# Altium PCB PMOD_Shifter_PCB_to1v8.PcbDoc
Units mil, origin at the board's own origin, x right, y up, seen from the top; angles counter-clockwise.
Board outline 1650 x 780 mil, 2 copper layers (Top Layer, Bottom Layer); 16 components, 20 nets, 82 pads, 8 vias.
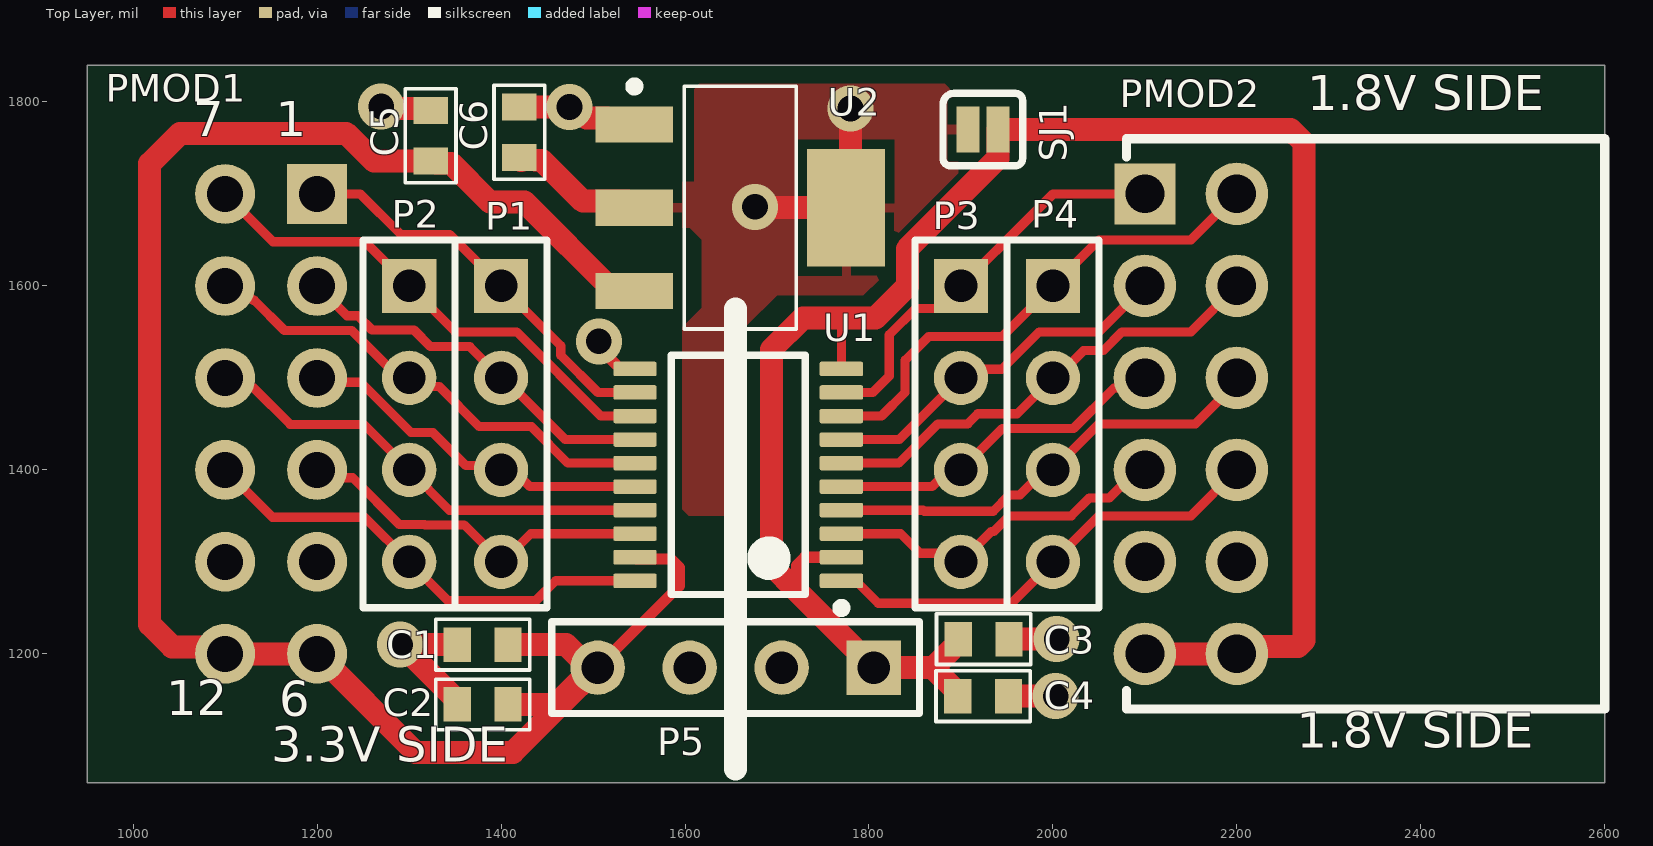
[diagram p0: Top Layer view]
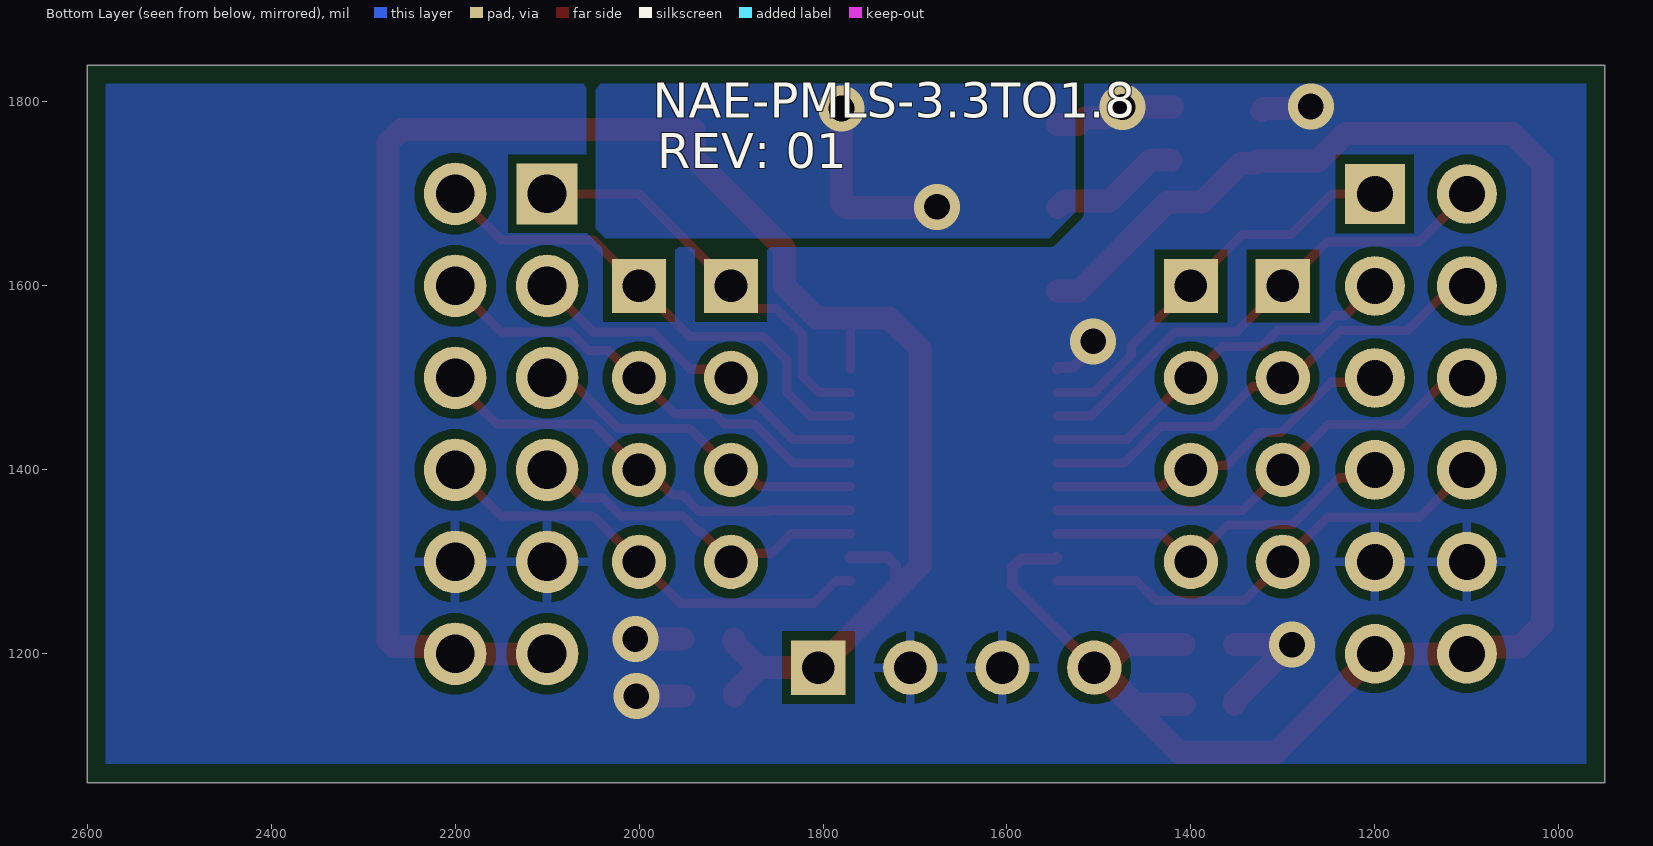
[diagram p1: Bottom Layer view, seen from below]
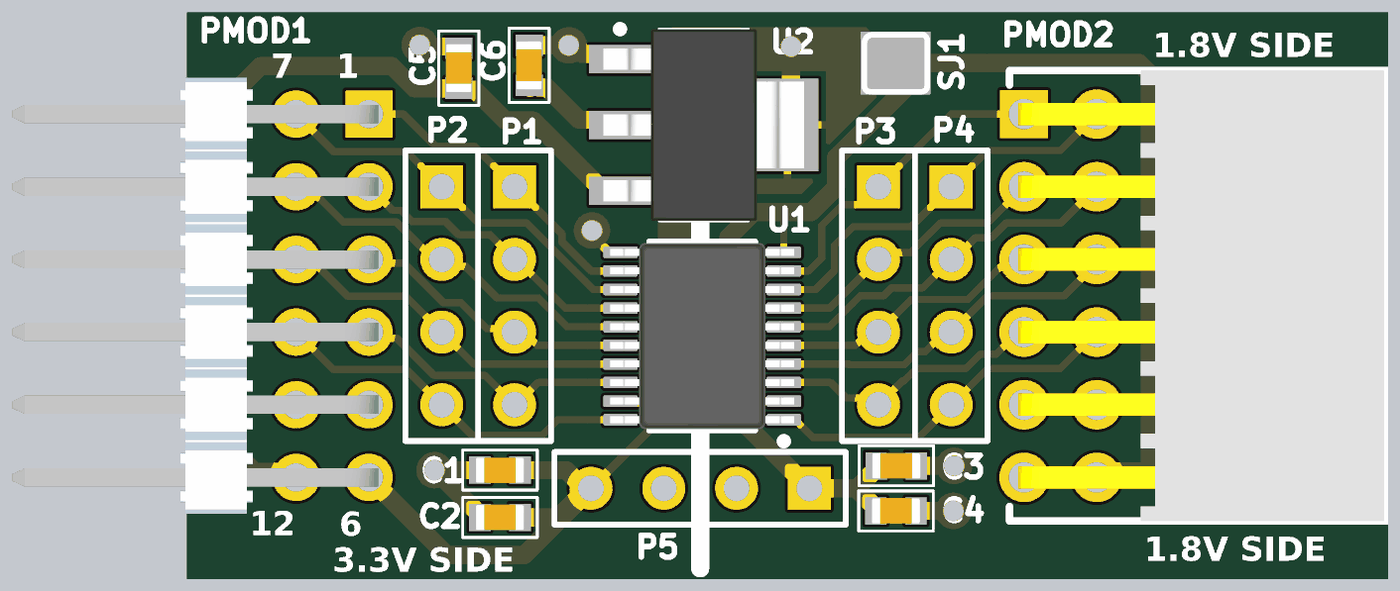
[diagram p2: 3D render of the assembled board from above, using the file's embedded part models]

## Layer stack, top to bottom
Top Solder: solder mask 0.4, Solder Resist, Dk 3.5
Top Layer: signal copper 1.4
Dielectric 1: dielectric 12.6, FR-4, Dk 4.8
Bottom Layer: signal copper 1.4
Bottom Solder: solder mask 0.4, Solder Resist, Dk 3.5

## Board outline
950,1060 2600,1060 2600,1840 950,1840

## Design rules (kind name [scope] priority, off if disabled: settings)
BoardOutlineClearance Silk_to_Outline [(OnLayer('Top Overlay'))] p1: gap=0 ignorepadtopadclearanceinfootprint=FALSE
BoardOutlineClearance [All] p2: gap=20 ignorepadtopadclearanceinfootprint=FALSE
Clearance [All] p1: gap=6 ignorepadtopadclearanceinfootprint=FALSE except(0: Arc-Hole Track-Hole SMDPad-Hole THPad-Hole Via-Hole Fill-Hole Poly-Hole Region-Hole Text-Hole)
HoleSize [All] p1: absolutevalues=TRUE maxlimit=200 minlimit=1 maxpercent=80.000 minpercent=20.000
MinimumSolderMaskSliver [All] p1: minsoldermaskwidth=5
PlaneConnect PlaneConnect_viaDirect [IsVia] p1: planeconnectstyle=Direct reliefexpansion=20 reliefentries=4 reliefconductorwidth=10 reliefairgap=10
PlaneConnect [All] p2: planeconnectstyle=Relief reliefexpansion=20 reliefentries=4 reliefconductorwidth=10 reliefairgap=10
PolygonConnect PolygonConnect_viaDirect [All vs isVia] p1: connectstyle=Direct reliefconductorwidth=10 reliefentries=4 polygonreliefangle="90 Angle" airgapwidth=10
PolygonConnect [All] p2: connectstyle=Relief reliefconductorwidth=10 reliefentries=4 polygonreliefangle="90 Angle" airgapwidth=10
RoutingVias [All] p1: holewidth=28 width=50 viastyle="Through Hole" minholewidth=28 minwidth=50 maxholewidth=28 maxwidth=50
SilkToSilkClearance [All] p1: silktosilkclearance=5
SilkToSolderMaskClearance [IsPad] p1: minsilkscreentomaskgap=5 clearancetoexposedcopper=TRUE
SolderMaskExpansion [All] p1: expansion=4 istentingtop=FALSE
Width [All] p1: maxlimit=100 minlimit=6 preferedwidth=8 minimp=50.000000 maximp=50.000000 favimp=50.000000
25 further rules are at their usual default settings.

## Components (designator, comment, footprint, x,y, rotation, side; value= is the part's Value field where it differs from the comment)
C1 "100n" CAPC0603_M 1380,1210 r180 top
C2 "2u2" CAPC0603_M 1380,1145 r180 top
C3 "100n" CAPC0603_M 1924.56,1216 r0 top
C4 "2u2" CAPC0603_M 1924,1154 r0 top
C5 "2u2" CAPC0603_M 1323.43,1763.18 r90 top
C6 "2u2" CAPC0603_M 1419.92,1767.01 r90 top
P1 "Header 4" HDR1X4 1400,1600 r270 top
P2 "Header 4" HDR1X4 1300,1600 r270 top
P3 "Header 4" HDR1X4 1900,1600 r270 top
P4 "Header 4" HDR1X4 2000,1600 r270 top
P5 "Header 4" HDR1X4 1805,1185 r180 top
PMOD1 "PMOD-PINS" PMOD-68021-212HLF-MALE 1200,1700 r0 top
PMOD2 "PMOD-SOCKET" SAMTEC_SSW_106_02_X_D_RA_PMOD 2100,1700 r0 top
SJ1 "NC" SJ_2S_NC 1923.78,1770 r0 top
U1 "TXB0108PWR" PW0020A_L 1657.8,1394.57 r180 top
U2 "LD1117S18" SOT-223 1660,1685 r0 top

## Footprints (in the part's own frame and the unit in brackets; to place one, negate y for a bottom-side part, rotate by r counter-clockwise, add the part's x,y. Pads: shape width x height; smd on the part's side, far side on the other; paste and mask are expansions set on the pad)
CAPC0603_M [mm]
  rect 0.75x0.95 smd: 1(-0.7,0) 2(0.7,0)
  silkscreen extent -1.3,-0.7 1.3,0.7, body extent -0.85,-0.45 0.85,0.45, height 0.9
HDR1X4 [mm] "Connector; Header; 4 Position"
  rect 1.5x1.5 hole 0.9: 1(0,0)
  round 1.5 hole 0.9: 2(2.54,0) 3(5.08,0) 4(7.62,0)
  silkscreen extent -1.27,-1.27 8.89,1.27
PMOD-68021-212HLF-MALE [mil]
  rect 65x65 hole 39: 1(0,0)
  round 65 hole 39: 2(0,-100) 3(0,-200) 4(0,-300) 5(0,-400) 6(0,-500) 7(-100,0) 8(-100,-100) 9(-100,-200) 10(-100,-300) 11(-100,-400) 12(-100,-500)
  body extent -490,-550 13,50, height 191
PW0020A_L [mm] "SOP, 20-Leads, Body 6.6x4.5mm, Pitch 0.65mm, IPC High Density"
  rrect25% 1.2x0.4 smd: 1(-2.85,2.925) 2(-2.85,2.275) 3(-2.85,1.625) 4(-2.85,0.975) 5(-2.85,0.325) 6(-2.85,-0.325) 7(-2.85,-0.975) 8(-2.85,-1.625) 9(-2.85,-2.275) 10(-2.85,-2.925) 11(2.85,-2.925) 12(2.85,-2.275) 13(2.85,-1.625) 14(2.85,-0.975) 15(2.85,-0.325) 16(2.85,0.325) 17(2.85,0.975) 18(2.85,1.625) 19(2.85,2.275) 20(2.85,2.925)
  silkscreen extent -2.98,-3.3 1.85,3.8, body extent -3.21,-3.25 3.21,3.25, height 1
SAMTEC_SSW_106_02_X_D_RA_PMOD [mil]
  rect 66x66 hole 42: 1(0,0)
  round 68 hole 42: 2(0,-100) 3(0,-200) 4(0,-300) 5(0,-400) 6(0,-500) 7(100,0) 8(100,-100) 9(100,-200) 10(100,-300) 11(100,-400) 12(100,-500)
  silkscreen extent -20,-560 500,60, body extent -8,-560 495,60, height 195
SJ_2S_NC [mil] "Solder Jumper, closed with solder paste"
  rect 25x50 smd: 1(-16.22,0) 2(16.22,0)
  silkscreen extent -43,-39 43,39
SOT-223 [mm] "SOT223, 4-Leads, Body 6.50x7.00mm (avg), Pitch 2.30mm, IPC Medium Density"
  rect 2.15x1 smd: 1(-2.925,2.3) 2(-2.925,0) 3(-2.925,-2.3)
  rect 2.15x3.25 smd: 4(2.925,0)
  silkscreen extent -3.05,-3.35 1.55,3.47, body extent -3.5,-3.35 3.5,3.35, height 1.8

## Part data
C1 C3: library part CCHIP-100n-0603, "100n, 0603", Case-EIA=0603, Case-Metric=1608, Manufacture 1=Kemet, Manufacture Part Number 1=C0603C104K5RACTU, Rated Voltage=50VDC, Supplier Part Number 1=399-5089-2-ND, Component Group=Capacitor, Component Type=Standard, Mounting Technology=SMT, Part Number=CCHIP-100n-0603, Pin Count=2, Supplier 1=Digi-Key
C2 C4 C5 C6: library part CCHIP-2u2-0603, "2u2, 0603", Case-EIA=0603, Case-Metric=1608, Manufacture 1=Samsung, Manufacture Part Number 1=CL10B225KP8NNNC, Rated Voltage=10VDC, Supplier Part Number 1=1276-1134-1-ND, Component Group=Capacitor, Component Type=Standard, Mounting Technology=SMT, Part Number=CCHIP-2u2-0603, Pin Count=2, Supplier 1=Digi-Key
P1 P2 P3 P4 P5: "Header, 4-Pin", LatestRevisionDate=17-Jul-2002, LatestRevisionNote="Re-released for DXP Platform.", Publisher="Altium Limited"
PMOD1: library part PMOD_2ROW_MALERATH, Component Group=Connector, Component Type=Standard, Part Number=PMOD_2ROW_MALERATH, Pin Count=12, PP Material Stack=0, PP Rotation=0, PP Rotation1=0, Supplier 1=Digi-Key
PMOD2: library part PMOD_2ROW_FEMALERATH, Supplier Part Number 1=SAM1215-06-ND, Component Group=Connector, Component Type=Standard, Part Number=PMOD_2ROW_FEMALERATH, Pin Count=12, PP Material Stack=0, PP Rotation=0, PP Rotation1=0, Supplier 1=Digi-Key
SJ1: library part SJ_2S, "Solder Jumper, NC", Component Group="PCB Feature", Component Type="Standard (No BOM)", Mounting Technology=COPPER, Part Number=SJ_2S, Pin Count=2
U1: library part CMP-2000-07337-1, "TXB0108 8-Bit Bidirectional Voltage-Level Translator with Auto-Direction Sensing and / +/- 15-kV ESD Protection, 1.2 to 3.6 V, -40 to 85 degC, 20-Pin TSSOP (PW), Green (RoHS & no Sb/Br), Tape and Reel", Manufacturer="Texas Instruments", Operating Temperature=-40°C~85°C, Package / Case="20-TSSOP(0.173\",4.40mmWidth)", Package Description="20-Pin Small Outline Package Integrated Circuit, Body 6.5 x 4.4 mm, Pitch 0.65 mm", Package Reference=PW20, Package Version="4040064-5/G, 02/2011", Standard Package=1, Supplier Device Package=20-TSSOP, Voltage - Supply=1.2V~3.6V,1.65V~5.5V, Category=IntegratedCircuits(ICs), Data Rate=100Mbps, Datasheet URL=http://www.ti.com/general/docs/lit/getliterature.tsp?genericPartNumber=TXB0108&fileType=pdf, Datasheet Version="Rev. F, 12/2014", Differential - Input=Output:No/No, Dynamic Catalog=TXBSeries, Family=Logic-Translators, Input Type=Logic, Logic Function=Translator,Bidirectional, Manufacturer URL=http://www.ti.com/, Mounting Technology=SurfaceMount, Number of Bits=8, Number of Channels=8, Number of Outputs/Channel=1, Other Names=296-21527-6, Output Type=Logic, Package URL=http://www.ti.com/litv/pdf/mpds362, Packaging=Digi-Reel®, Product Training Modules=VoltageLevelTranslation, Propagation Delay (Max)=4ns, Series=-
U2: "IC REG LIN POS 1.8V 800MA SOT223", Manufacture 1=STMicroelectronics, Manufacture Part Number 1=LD1117S18TR, Rated Voltage=15V, Supplier Part Number 1=497-7308-1-ND, Component Group="Analog IC", Component Type=Standard, Mounting Technology=SMT, Part Number=LD1117S18, Pin Count=3, PP Material Stack=0, PP Rotation=0, RoHS=Yes, Supplier 1=Digi-Key

## Via types
v1: diameter 50, hole 28, Top Layer to Bottom Layer, tented both sides, 8 vias

## Nets (pads, with @x,y where several pads share a name; then routed paths per layer and width w, separated by ;. In a path a pad name is that pad's centre, name@x,y a point inside that pad or via, vN(x,y) a via of type N, cw(c..) or ccw(c..) an arc to the next point about the centre after c; other vN are vias at no path point)
GND: C1.2 C2.2 C3.2 C4.2 C5.2 C6.2 P5.2 P5.3 PMOD1.5 PMOD1.11 PMOD2.5 PMOD2.11 U1.11 U2.1 | length 510.2
  Top Layer w12: v1@1499,1547.08 v1(1506.32,1539.76) 1506.32,1533.25 1528.25,1511.32 1544,1511.32 U1.11
  Top Layer w25: v1(1269.7,1795) 1271.83,1792.87 1321.3,1792.87 C5.2 ; v1(1290,1210) v1@1291.38,1210 ; C2.2 1352.44,1148.94 v1@1291.38,1210 ; C1.2 v1@1291.38,1210 ; C6.2 1474.43,1794.56 1481.21,1794.55 1493.02,1782.74 1515.02,1782.74 1522.2,1775.55 U2.1 ; C4.2 v1(2003,1154) ; C3.2 v1(2004,1216)
  other v1: 1474.45,1794.55
NetC1_1: C1.1 C2.1 C5.1 P5.4 PMOD1.6 PMOD1.12 U1.19 U2.3 | length 2110.6
  Top Layer w12: P5.4 1594,1274 1594,1294 1584.87,1303.13 1547.46,1303.13 U1.19
  Top Layer w25: C2.1 1459.82,1145 P5.4@1499.82,1185 ; C1.1 1470.78,1210 1495.78,1185 P5.4@1499.82,1185 ; U2.3 1522.2,1594.45 1425.65,1691 1388,1691 1345.64,1733.36 1329.63,1733.36 1327.36,1735.62 1261.9,1735.62 1231.57,1765.96 1051.1,1765.96 1018,1732.86 1018,1232 1042.35,1207.65 1092.35,1207.65 PMOD1.12 PMOD1.6 1307,1093 1413,1093 1462.41,1142.41 P5.4 P5.4@1499.82,1185
NetC3_1: C3.1 C4.1 P5.1 PMOD2.6 PMOD2.12 SJ1.2 U1.2 U1.10 | length 2126.9
  Top Layer w10: 1767.5,1565 1770,1562.5 U1.10
  Top Layer w12: 1721,1269 1721,1296 1730,1305 U1.2
  Top Layer w25: C4.1 1896.44,1157.94 1869.38,1185 ; C3.1 1897,1212.06 1869.94,1185 1869.38,1185 ; PMOD2.6@2097.5,1197.5 PMOD2.6 PMOD2.12 2208.23,1208.23 2266.58,1208.23 2273,1214.64 2273,1755.36 2258.36,1770 SJ1.2 1940,1738.77 1841.61,1640.38 1841.61,1599.61 1807,1565 1767.5,1565 1728,1565 1694,1531 1694,1296 1721,1269 P5.1 1869.38,1185
NetC6_1: C6.1 SJ1.1 U2.2 U2.4 | length 354.4
  Top Layer w25: C6.1@1421.41,1736.15 1426.12,1737.19 1444.73,1736.3 1488.84,1692.19 1537.66,1692.19 U2.2 ; v1(1676,1686) 1677,1685 U2.4 1780,1689.84 v1(1780,1793)
NetP1_1: P1.1 PMOD1.1 U1.12 | length 441.2
  Top Layer w10: PMOD1.1 1247,1700 1291,1656 1344,1656 1464.95,1535.05 1464.95,1524.56 1505.38,1484.13 U1.12
NetP1_2: P1.2 PMOD1.2 U1.14 | length 414.8
  Top Layer w10: PMOD1.2 1232.52,1567.48 1244.22,1567.48 1259.7,1552 1305.31,1552 1323.31,1534 1366,1534 P1.2 1402.63,1500 1469.67,1432.95 U1.14
NetP1_3: P1.3 PMOD1.3 U1.16 | length 394.6
  Top Layer w10: PMOD1.3 1204.81,1495.19 1247.5,1495.19 1302.16,1440.53 1325.95,1440.53 1361.75,1404.72 1395.28,1404.72 P1.3 1413.27,1400 1431.5,1381.77 U1.16
NetP1_4: P1.4 PMOD1.4 U1.18 | length 399.7
  Top Layer w10: PMOD1.4 1208.62,1391.38 1238.56,1391.38 1289.38,1340.56 1316.75,1340.56 1317.13,1340.18 1359.82,1340.18 P1.4 1401.79,1300 1432.38,1330.59 U1.18
NetP2_1: P2.1 PMOD1.7 U1.13 | length 546.2
  Top Layer w10: PMOD1.7 1101,1700 1101,1699 1152,1648 1252,1648 P2.1 1350,1550 1416.88,1550 1508.34,1458.54 U1.13
NetP2_2: P2.2 PMOD1.8 U1.15 | length 525.4
  Top Layer w10: PMOD1.8 1114.88,1600 1130.47,1584.41 1131.59,1584.41 1164.52,1551.48 1237.59,1551.48 1289.07,1500 P2.2 1309.39,1490.61 1332.71,1490.61 1376.32,1447 1433,1447 1472.64,1407.36 U1.15
NetP2_3: P2.3 PMOD1.9 U1.17 | length 505.2
  Top Layer w10: PMOD1.9 1110.52,1489.48 1130.58,1489.48 1170.62,1449.43 1250.57,1449.43 P2.3 1343.82,1356.18 U1.17
NetP2_4: P2.4 PMOD1.10 U1.20 | length 516.2
  Top Layer w10: PMOD1.10 1100,1395 1105,1395 1151.49,1348.51 1251.49,1348.51 P2.4 1342,1258 1438,1258 1459.41,1279.41 U1.20
NetP3_1: P3.1 PMOD2.1 U1.9 | length 445.6
  Top Layer w10: U1.9 1804.13,1484.13 1822.07,1502.07 1822.07,1546.83 1850.71,1575.47 1875.47,1575.47 2000,1700 PMOD2.1
NetP3_2: P3.2 PMOD2.2 U1.7 | length 399.2
  Top Layer w10: U1.7 1832.95,1432.95 P3.2 1909.39,1509.39 1944.39,1509.39 1985,1550 2050,1550 PMOD2.2
NetP3_3: P3.3 PMOD2.3 U1.5 | length 379
  Top Layer w10: U1.5 1868.5,1381.77 1886.73,1400 P3.3 1945,1445 2022.37,1445 2066.27,1488.9 2088.9,1488.9 PMOD2.3
NetP3_4: P3.4 PMOD2.4 U1.3 | length 384.1
  Top Layer w10: U1.3 1834.41,1330.59 1855.61,1309.39 1890.61,1309.39 P3.4 1933.01,1333.01 1935.64,1333.01 1952.63,1350 2020,1350 2039.45,1369.45 2061.25,1369.45 2091.8,1400 PMOD2.4
NetP4_1: P4.1 PMOD2.7 U1.8 | length 550.5
  Top Layer w10: U1.8 1813.54,1458.54 1839.27,1484.27 1839.27,1519.27 1865,1545 1945,1545 P4.1 2050,1650 2150,1650 PMOD2.7
NetP4_2: P4.2 PMOD2.8 U1.6 | length 509.8
  Top Layer w10: U1.6 1832.36,1407.36 1875,1450 1907.31,1450 1918.31,1461 1961,1461 P4.2 2003.59,1500 2033.28,1529.69 2054.69,1529.69 2075,1550 2150,1550 PMOD2.8
NetP4_3: P4.3 PMOD2.9 U1.4 | length 493.5
  Top Layer w10: U1.4 1858.82,1356.18 1860,1355 1935,1355 1952.81,1372.81 1964.22,1372.81 1991.41,1400 P4.3 2050,1450 2155,1450 2200,1495 PMOD2.9
NetP4_4: P4.4 PMOD2.10 U1.1 | length 500.2
  Top Layer w10: U1.1 1785.75,1279.41 1810.16,1255 1955,1255 P4.4 2050,1350 2150,1350 PMOD2.10

## Polygon pours and split planes (outlines as drawn)
NetC6_1 on Top Layer "NETC6_1_L01_P000" (solid, pour order 0): 1496,1711 1498,1713 1610,1713 1610,1814 1622,1826 1876,1826 1897,1805 1897,1722 1819,1644 1819,1615 1794,1590 1700,1590 1666,1556 1666,1350 1604,1350 1597,1357 1597,1555 1618,1576 1618,1650 1605,1663 1499,1663 1496,1666
GND on Bottom Layer "GND_L02_P002" (solid, pour order 2): 945,1870 964,1889 2645,1889 2645,1035 2623,1013 907,1013
NetC6_1 on Bottom Layer "NETC6_1_L02_P001" (solid, pour order 1): 1533,1826 2035,1826 2047,1814 2047,1662 2037,1652 1554,1652 1526,1680 1526,1819

## Silkscreen, mask and mechanical layers (free items; w line width, h text height)
Top Overlay:
  lines w25: 1655,1075 1655,1575
  text "1.8V SIDE" at 2276.69,1778.74 h65
  text "1.8V SIDE" at 2265,1085.45 h65
  text "3.3V SIDE" at 1150.04,1070.41 h65
Bottom Overlay:
  text "NAE-PMLS-3.3TO1.8" at 1984.96,1770.45 h65
  text "REV: 01" at 1979.96,1715.41 h65
Mechanical 1:
  the board outline again, w10

## Text inside footprints (layer, text, board x,y; h text height)
PMOD1: Top Overlay "1" at 1154.86,1750.02 h65; Top Overlay "7" at 1065.33,1750.1 h65; Top Overlay "12" at 1035.83,1120.61 h65; Top Overlay "6" at 1159.07,1119.81 h65